# EAGLE board proximitySensor (EAGLE 7.6.0)
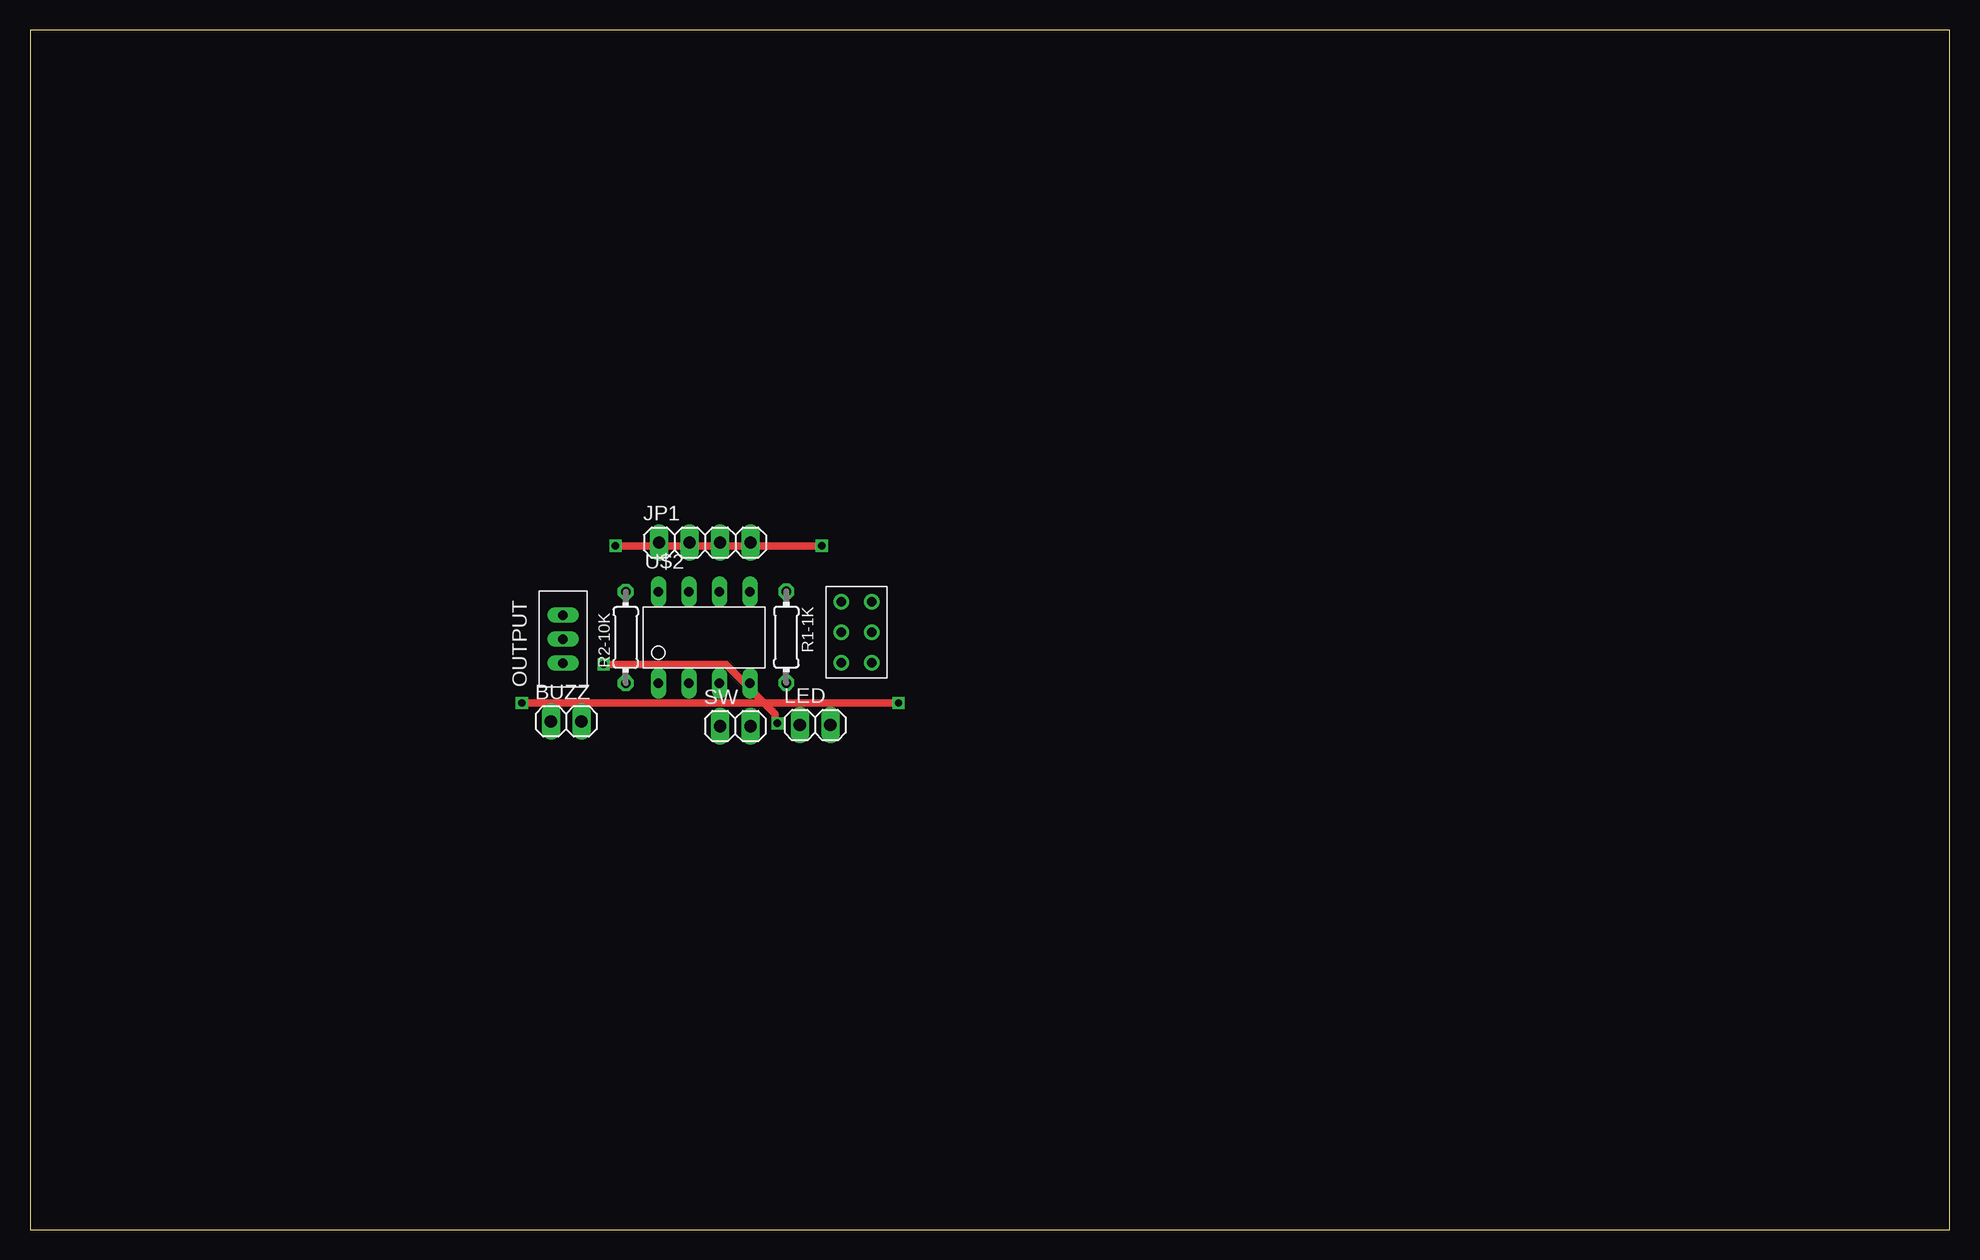
[diagram p0: board, top side]
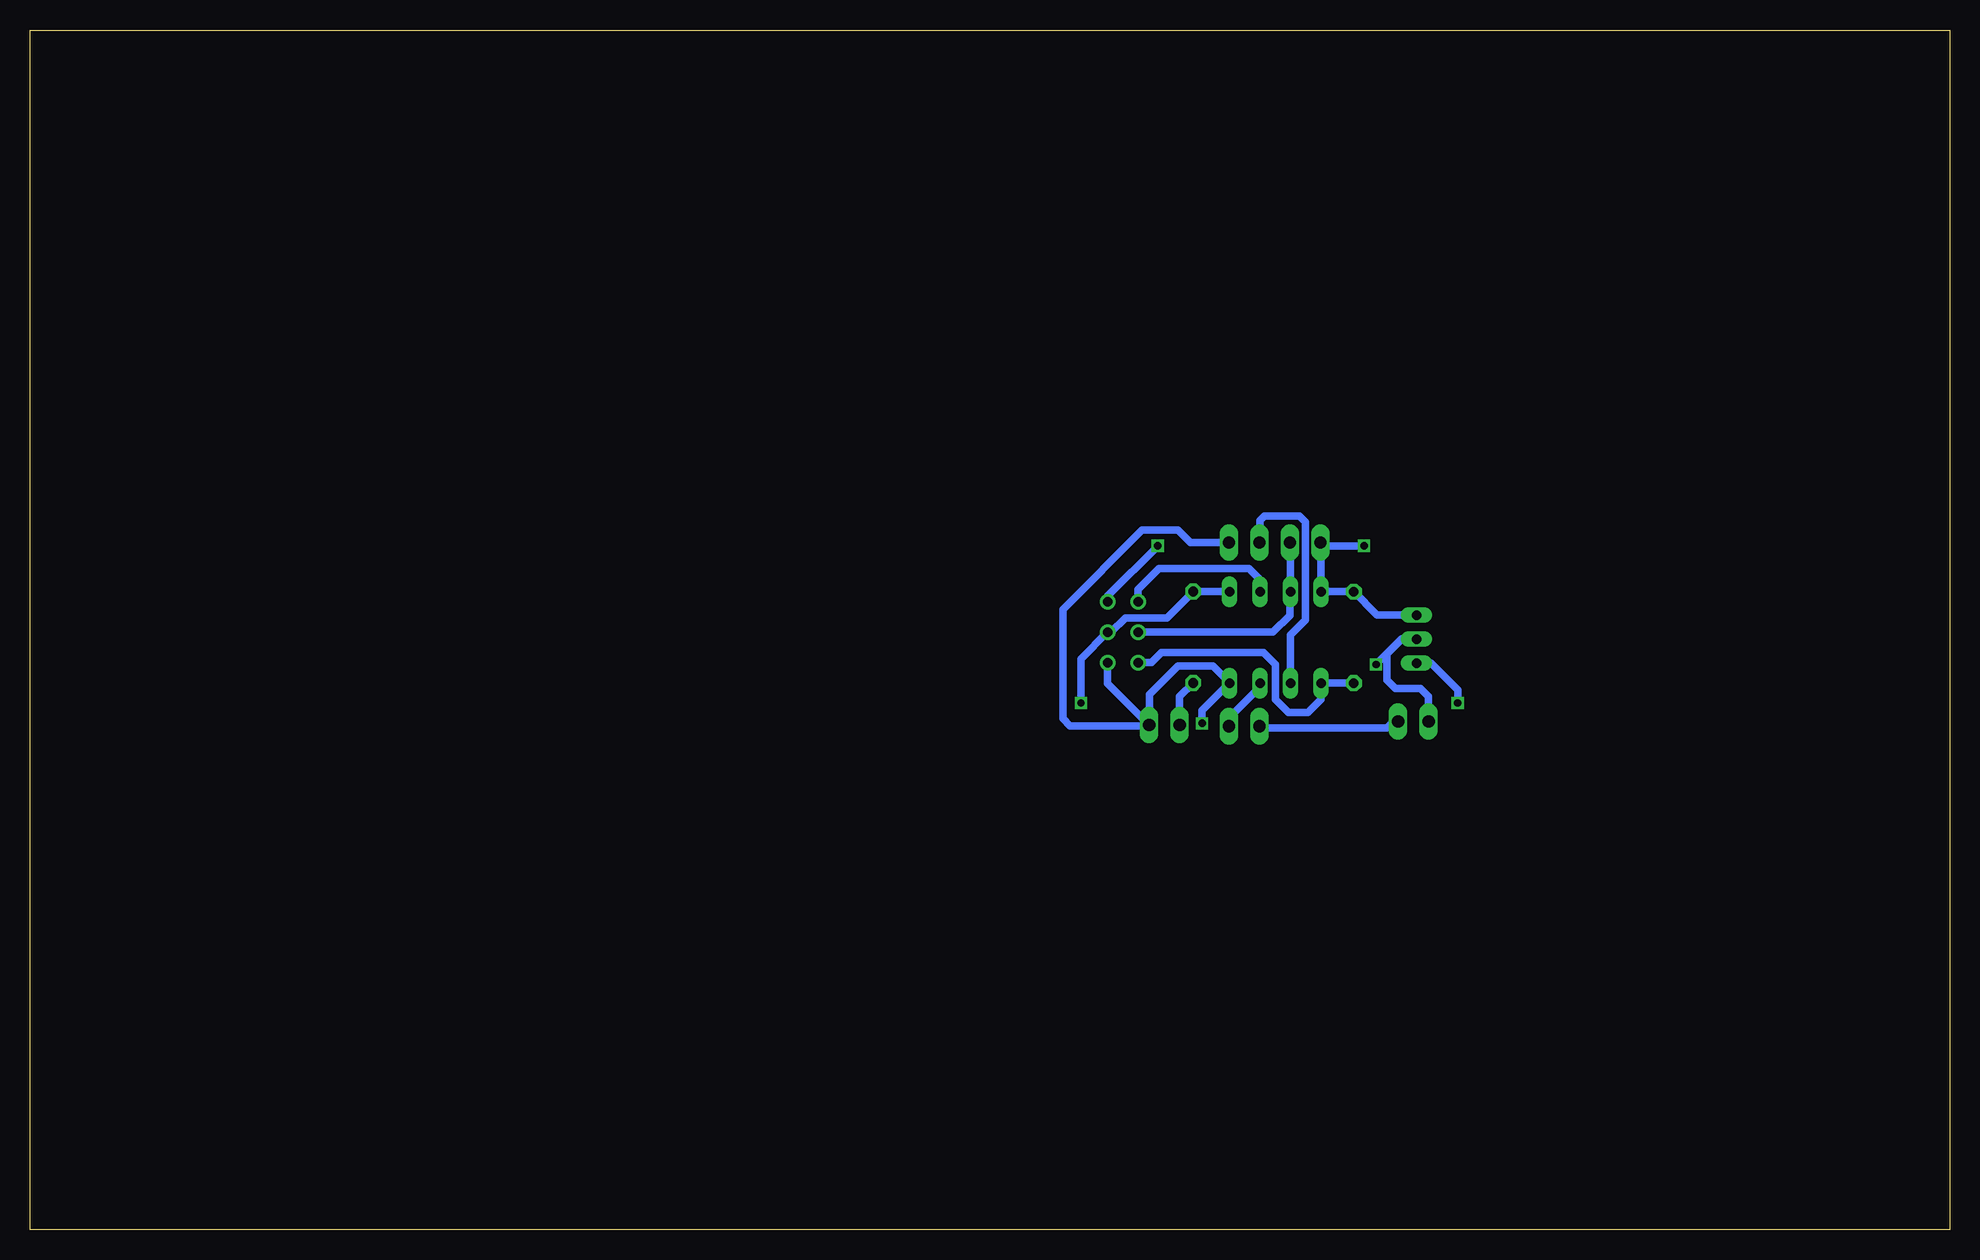
[diagram p1: board, bottom side, seen from below]

Size 160 x 100 mm. Coordinates in mm from the lower left corner, seen from the top.
Outline: 0,0 160,0 160,100 0,100 0,0
Copper layers (1*16): Top 0.035mm / dielectric 1.5mm / Bottom 0.035mm
Design rules "default": minimum track width 10mil, minimum drill 24mil, track to track 8mil, track to pad 8mil, pad to pad 8mil, via to via 8mil, smd to smd 8mil, copper to edge 40mil, drill to drill 8mil, minimum pad ring 10mil, minimum via ring 8mil, stop-mask expansion 4mil, vias tented up to drill 0mil, thermal gap 10mil

## Footprints (pad centres in the part's own frame; a part is rotated, then mirrored left to right if it is on the bottom)
1X02 = drill 1.016 long: 1 -1.27,0; 2 1.27,0
1X04 = drill 1.016 long: 1 -3.81,0; 2 -1.27,0; 3 1.27,0; 4 3.81,0
PINHEADER = drill 0.8 long: 1 -2,0; 2 0,0; 3 2,0
0204/7 = drill 0.813 octagon: 1 -3.81,0; 2 3.81,0
HEAD-2X3 = drill 0.8: 1 -2.54,-1.27; 2 0,-1.27; 3 2.54,-1.27; 4 2.54,1.27; 5 0,1.27; 6 -2.54,1.27
DIL-8 = drill 0.8 long: 1 -3.81,-6.35; 2 -1.27,-6.35; 3 1.27,-6.35; 4 3.81,-6.35; 5 3.81,1.27; 6 1.27,1.27; 7 -1.27,1.27; 8 -3.81,1.27

## Placement (x,y rotation side)
BUZZ  [1X02]  44.69,42.36 0 top
JP1  [1X04]  56.26,57.27 0 top
LED  [1X02]  65.44,42.06 0 top
OUTPUT  PINH_1X3  [PINHEADER]  44.43,49.22 90 top
R1-1K  [0204/7]  63.04,49.38 270 top
R2-10K  [0204/7]  49.66,49.36 90 top
SW  [1X02]  58.79,41.96 0 top
U$1  SPI  [HEAD-2X3]  68.9,49.8 270 top
U$2  ATTINY85  [DIL-8]  56.2,51.9 0 top

## Library data of the parts
BUZZ JP1 LED SW = pinhead
OUTPUT = pinhead_2mm
R1-1K R2-10K = rcl
U$1 = spi
U$2 = attiny

## Nets
ECHO: JP1.3 U$2.2
GND: BUZZ.1 JP1.4 LED.2 OUTPUT.2 U$1.4 U$2.4
MISO: U$1.1 U$2.6
N$3: SW.2 U$2.3
N$12: LED.1 R1-1K.2
N$14: BUZZ.2 SW.1
OUT: OUTPUT.1 R1-1K.1 U$1.5 U$2.5
RESET: R2-10K.1 U$1.3 U$2.1
TRIG: JP1.2 U$1.2 U$2.7
VCC: JP1.1 OUTPUT.3 R2-10K.2 U$1.6 U$2.8

## Tracks (layer width: path | path; a pad name or v marks a point on that pad's centre or on a via)
ECHO
  Bottom 0.61: U$2.2 54.93,49.57 53.7,50.8 53.7,59 54.2,59.5 57.1,59.5 57.5,59.1 57.5,57.3 JP1.3
GND  (via drill 0.6)
  Top 0.61: v47.8,47.1 58,47.1 62.1,43 62.1,42.4 v62.3,42.2
  Bottom 0.61: JP1.4 63.27,57.27 64.3,58.3 67.3,58.3 73.9,51.7 73.9,42.6 73.3,42 67.2,42 | 67.2,42 66.77,42 LED.2 70.17,45.52 U$1.4 | 67.2,42 66.7,42.5 66.7,44.6 64.3,47 61.4,47 60.01,45.61 U$2.4 62.3,43.26 v62.3,42.2 | BUZZ.1 43.42,44.42 44.1,45.1 46.2,45.1 46.9,45.8 46.9,48 45.7,49.2 44.45,49.2 OUTPUT.2 45.68,49.22 v47.8,47.1
MISO
  Bottom 0.61: U$1.1 67.63,53.37 65.9,55.1 58.4,55.1 57.5,54.2 57.5,53.2 U$2.6
N$3
  Bottom 0.61: U$2.3 57.47,45.23 60.1,42.6 60.1,42 SW.2
N$12
  Bottom 0.61: LED.1 64.17,44.44 R1-1K.2
N$14
  Bottom 0.61: BUZZ.2 46.34,42.36 46.9,41.8 57.36,41.8 SW.1
OUT  (via drill 0.6)
  Top 0.61: v41,43.9 v72.4,43.9
  Bottom 0.61: U$2.5 63.02,53.17 R1-1K.1 65.23,51 68.7,51 69.9,49.8 U$1.5 72.4,47.57 v72.4,43.9 | OUTPUT.1 43.22,47.22 41,45 v41,43.9
RESET
  Bottom 0.61: U$1.3 66.54,47.26 65.7,48.1 57.2,48.1 56.2,47.1 56.2,44.2 55.1,43.1 53.5,43.1 52.4,44.2 U$2.1 R2-10K.1
TRIG
  Bottom 0.61: JP1.2 54.93,56.81 U$2.7 55,53.1 55,51.2 56.4,49.8 U$1.2
VCC  (via drill 0.6)
  Top 0.61: v66,57 v48.8,57
  Bottom 0.61: U$2.8 52.39,53.7 | 52.39,53.7 52.39,56.81 JP1.1 52.18,57 v48.8,57 | OUTPUT.3 47.71,51.22 R2-10K.2 51.86,53.17 52.39,53.7 | U$1.6 70.17,52.83 v66,57